# EAGLE board AnalogSimulator (EAGLE 7.2.0)
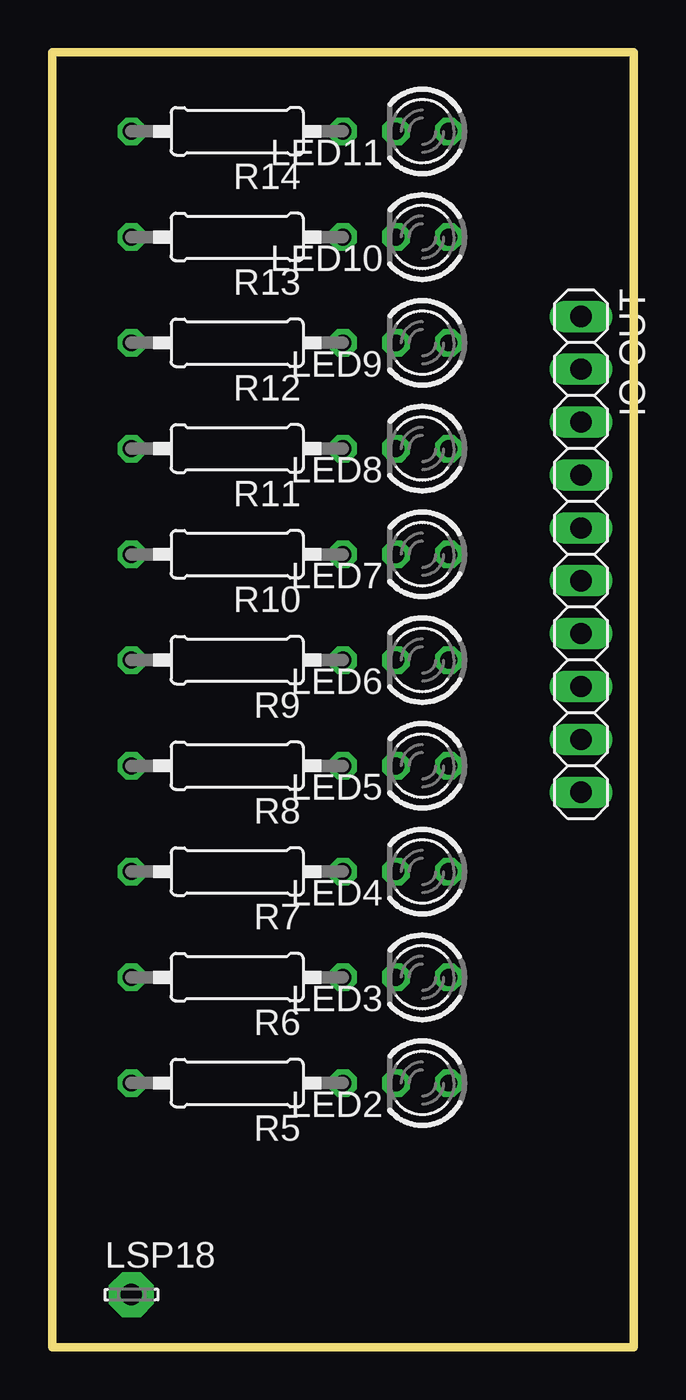
[diagram p0: board, top side]
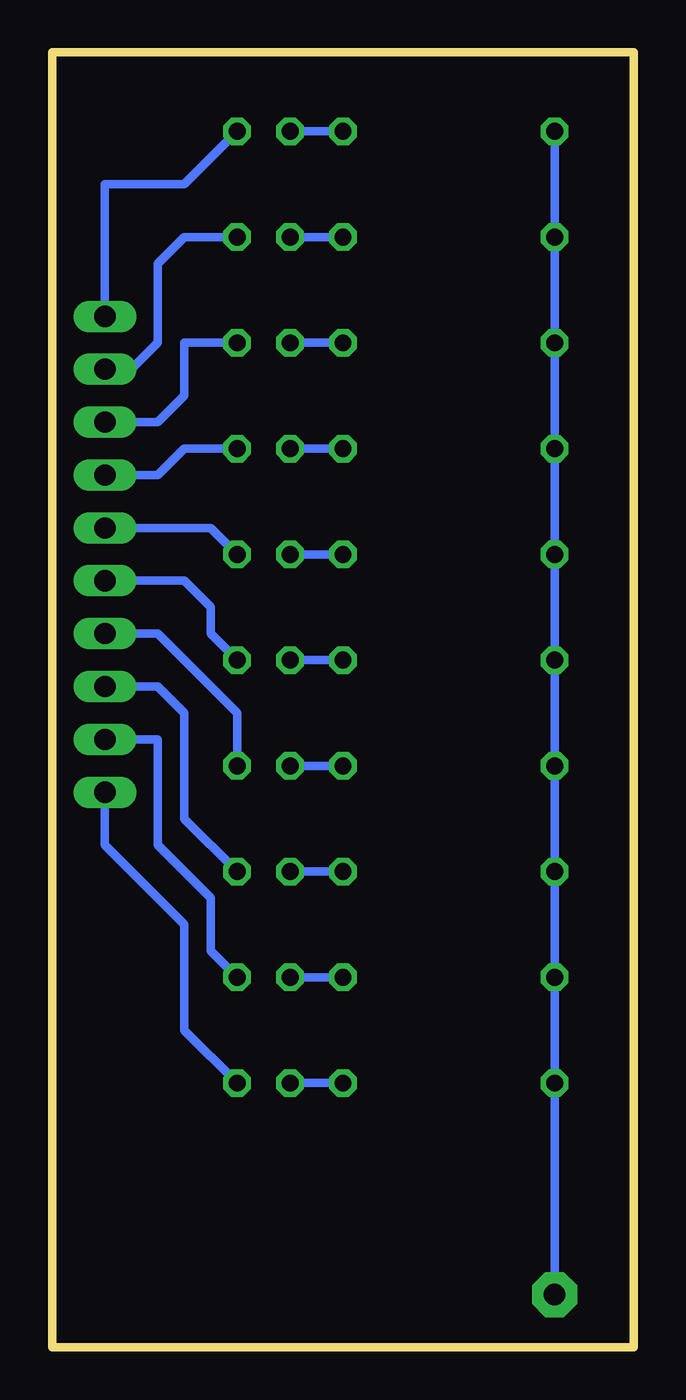
[diagram p1: board, bottom side, seen from below]

Size 27.94 x 62.23 mm. Coordinates in mm from the lower left corner, seen from the top.
Outline: 0,62.23 27.94,62.23 27.94,0 0,0 0,62.23
Copper layers (1*16): Top 0.035mm / dielectric 1.5mm / Bottom 0.035mm
Design rules "default": minimum track width 10mil, minimum drill 24mil, track to track 8mil, track to pad 8mil, pad to pad 8mil, via to via 8mil, smd to smd 8mil, copper to edge 40mil, drill to drill 8mil, minimum pad ring 10mil, minimum via ring 8mil, stop-mask expansion 4mil, vias tented up to drill 0mil, thermal gap 10mil

## Footprints (pad centres in the part's own frame; a part is rotated, then mirrored left to right if it is on the bottom)
1X10 = drill 1.016 long: 1 -11.43,0; 2 -8.89,0; 3 -6.35,0; 4 -3.81,0; 5 -1.27,0; 6 1.27,0; 7 3.81,0; 8 6.35,0; 9 8.89,0; 10 11.43,0
LED3MM = drill 0.813 octagon: A -1.27,0; K 1.27,0
LSP10 = drill 1.016 pad 2.159 octagon: MP 0,0
0207/10 = drill 0.813 octagon: 1 -5.08,0; 2 5.08,0

## Placement (x,y rotation side)
IO-OUT  [1X10]  25.4,38.1 270 top
LED2  [LED3MM]  17.78,12.7 180 top
LED3  [LED3MM]  17.78,17.78 180 top
LED4  [LED3MM]  17.78,22.86 180 top
LED5  [LED3MM]  17.78,27.94 180 top
LED6  [LED3MM]  17.78,33.02 180 top
LED7  [LED3MM]  17.78,38.1 180 top
LED8  [LED3MM]  17.78,43.18 180 top
LED9  [LED3MM]  17.78,48.26 180 top
LED10  [LED3MM]  17.78,53.34 180 top
LED11  [LED3MM]  17.78,58.42 180 top
LSP18  LSP10  [LSP10]  3.81,2.54 0 top
R5  220  [0207/10]  8.89,12.7 180 top
R6  220  [0207/10]  8.89,17.78 180 top
R7  220  [0207/10]  8.89,22.86 180 top
R8  220  [0207/10]  8.89,27.94 180 top
R9  220  [0207/10]  8.89,33.02 180 top
R10  220  [0207/10]  8.89,38.1 180 top
R11  220  [0207/10]  8.89,43.18 180 top
R12  220  [0207/10]  8.89,48.26 180 top
R13  220  [0207/10]  8.89,53.34 180 top
R14  220  [0207/10]  8.89,58.42 180 top

## Library data of the parts
IO-OUT = pinhead
LED2-LED11 = led
LSP18 = solpad
R5-R14 = rcl

## Nets
N$41: LED2.K R5.1
N$42: LED3.K R6.1
N$43: LED4.K R7.1
N$44: LED5.K R8.1
N$45: LED6.K R9.1
N$46: LED7.K R10.1
N$47: LED8.K R11.1
N$48: LED9.K R12.1
N$49: LED10.K R13.1
N$50: LED11.K R14.1
N$52: IO-OUT.10 LED2.A
N$53: IO-OUT.9 LED3.A
N$54: IO-OUT.8 LED4.A
N$55: IO-OUT.7 LED5.A
N$56: IO-OUT.6 LED6.A
N$57: IO-OUT.5 LED7.A
N$58: IO-OUT.4 LED8.A
N$59: IO-OUT.3 LED9.A
N$60: IO-OUT.2 LED10.A
N$61: IO-OUT.1 LED11.A
N$123: LSP18.MP R5.2 R6.2 R7.2 R8.2 R9.2 R10.2 R11.2 R12.2 R13.2 R14.2

## Tracks (layer width: path | path; a pad name or v marks a point on that pad's centre or on a via)
N$41
  Bottom 0.406: LED2.K R5.1
N$42
  Bottom 0.406: LED3.K R6.1
N$43
  Bottom 0.406: LED4.K R7.1
N$44
  Bottom 0.406: LED5.K R8.1
N$45
  Bottom 0.406: LED6.K R9.1
N$46
  Bottom 0.406: LED7.K R10.1
N$47
  Bottom 0.406: R11.1 LED8.K
N$48
  Bottom 0.406: R12.1 LED9.K
N$49
  Bottom 0.406: R13.1 LED10.K
N$50
  Bottom 0.406: R14.1 LED11.K
N$52
  Bottom 0.406: LED2.A 21.59,15.24 21.59,20.32 25.4,24.13 IO-OUT.10
N$53
  Bottom 0.406: LED3.A 20.32,19.05 20.32,21.59 22.86,24.13 22.86,29.21 IO-OUT.9
N$54
  Bottom 0.406: LED4.A 21.59,25.4 21.59,30.48 22.86,31.75 IO-OUT.8
N$55
  Bottom 0.406: LED5.A 19.05,30.48 22.86,34.29 IO-OUT.7
N$56
  Bottom 0.406: LED6.A 20.32,34.29 20.32,35.56 21.59,36.83 IO-OUT.6
N$57
  Bottom 0.406: LED7.A 20.32,39.37 IO-OUT.5
N$58
  Bottom 0.406: LED8.A 21.59,43.18 22.86,41.91 IO-OUT.4
N$59
  Bottom 0.406: LED9.A 21.59,48.26 21.59,45.72 22.86,44.45 IO-OUT.3
N$60
  Bottom 0.406: LED10.A 21.59,53.34 22.86,52.07 22.86,48.26 24.13,46.99 IO-OUT.2
N$61
  Bottom 0.406: LED11.A 21.59,55.88 25.4,55.88 IO-OUT.1
N$123
  Bottom 0.406: R14.2 R13.2 R12.2 R11.2 R10.2 R9.2 R8.2 R7.2 R6.2 R5.2 LSP18.MP